# Altium PCB PCB1.PcbDoc
Units mm, origin at the board's own origin, x right, y up, seen from the top; angles counter-clockwise.
Board outline 82.8 x 98 mm, 2 copper layers (Top Layer, Bottom Layer); 9 components, 5 nets, 28 pads, 2 vias.
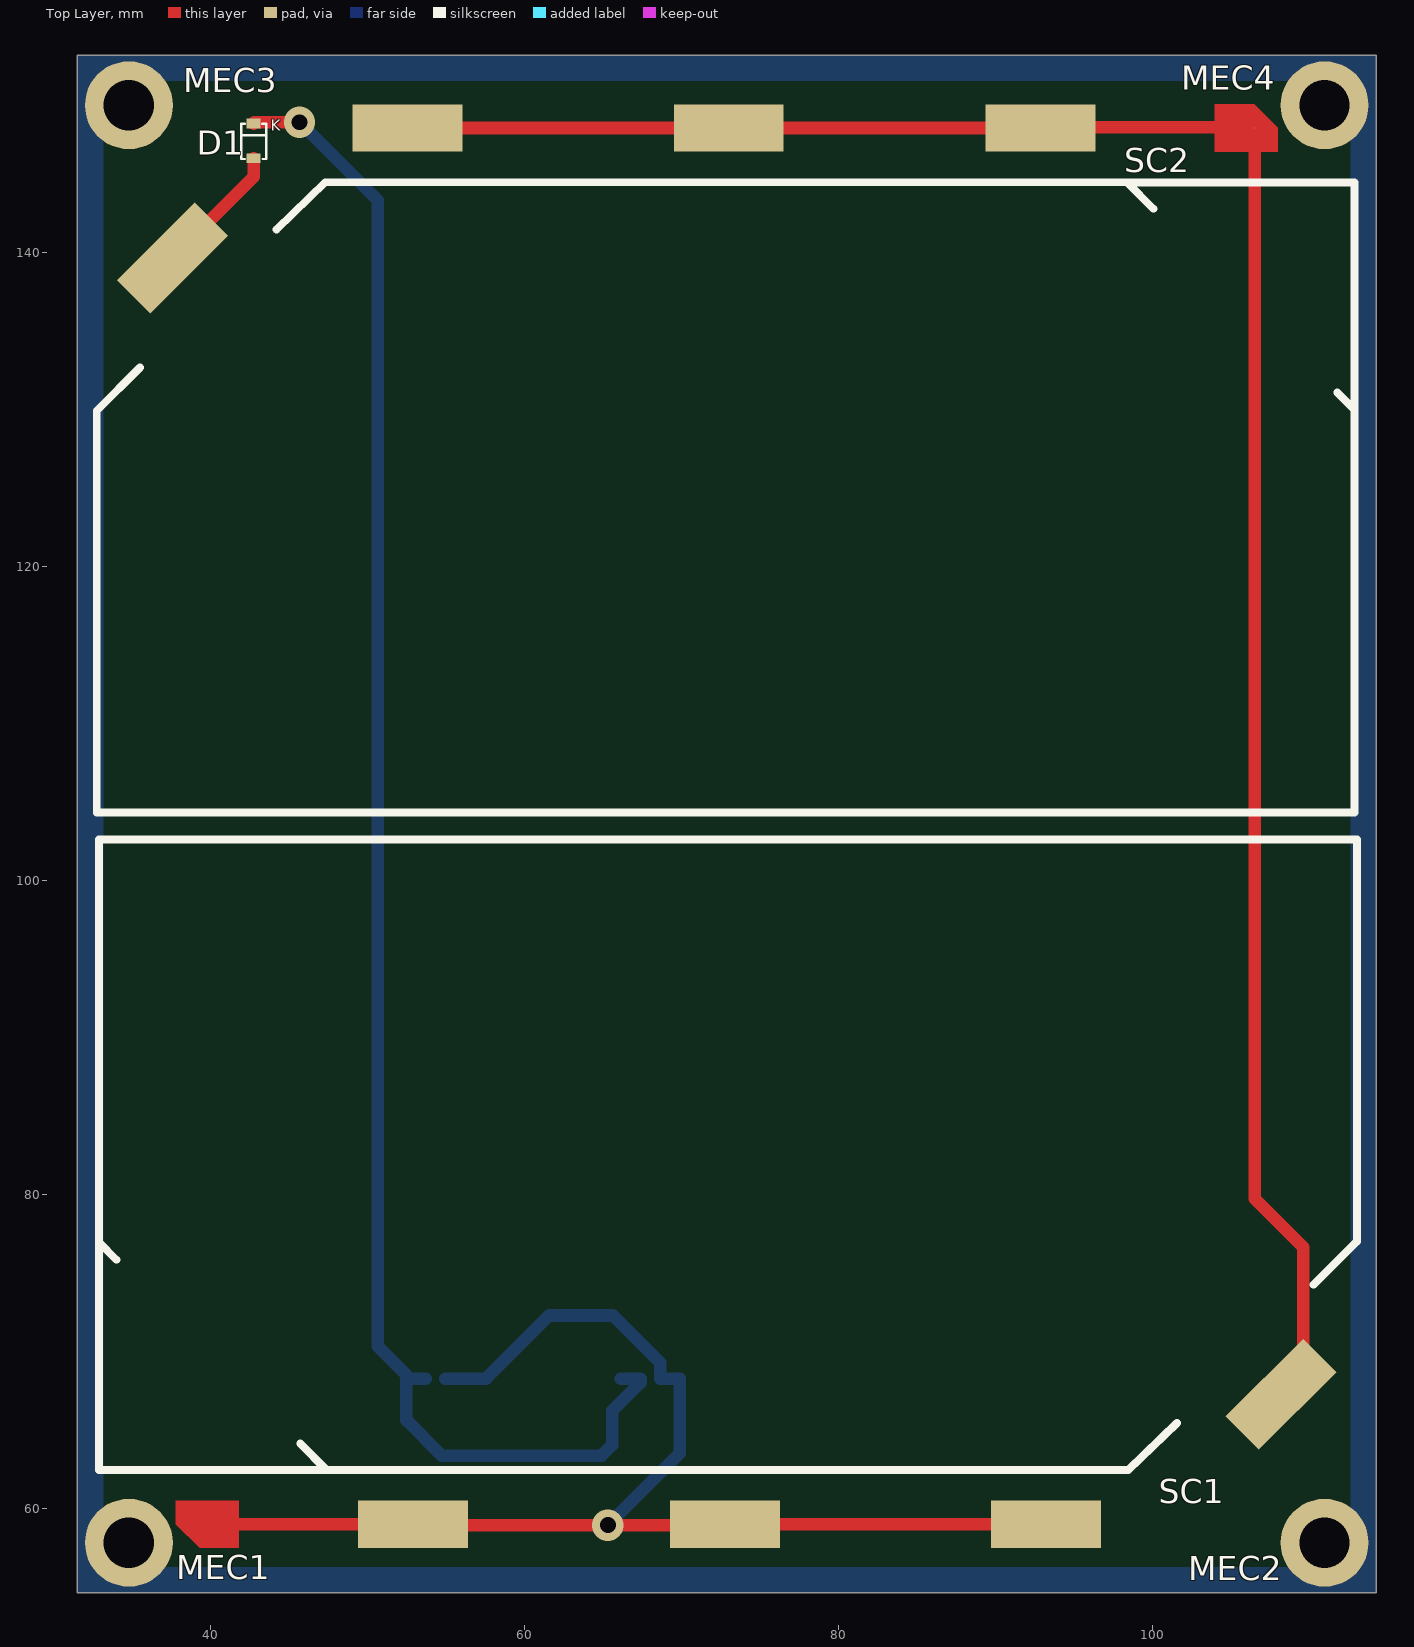
[diagram p0: Top Layer view]
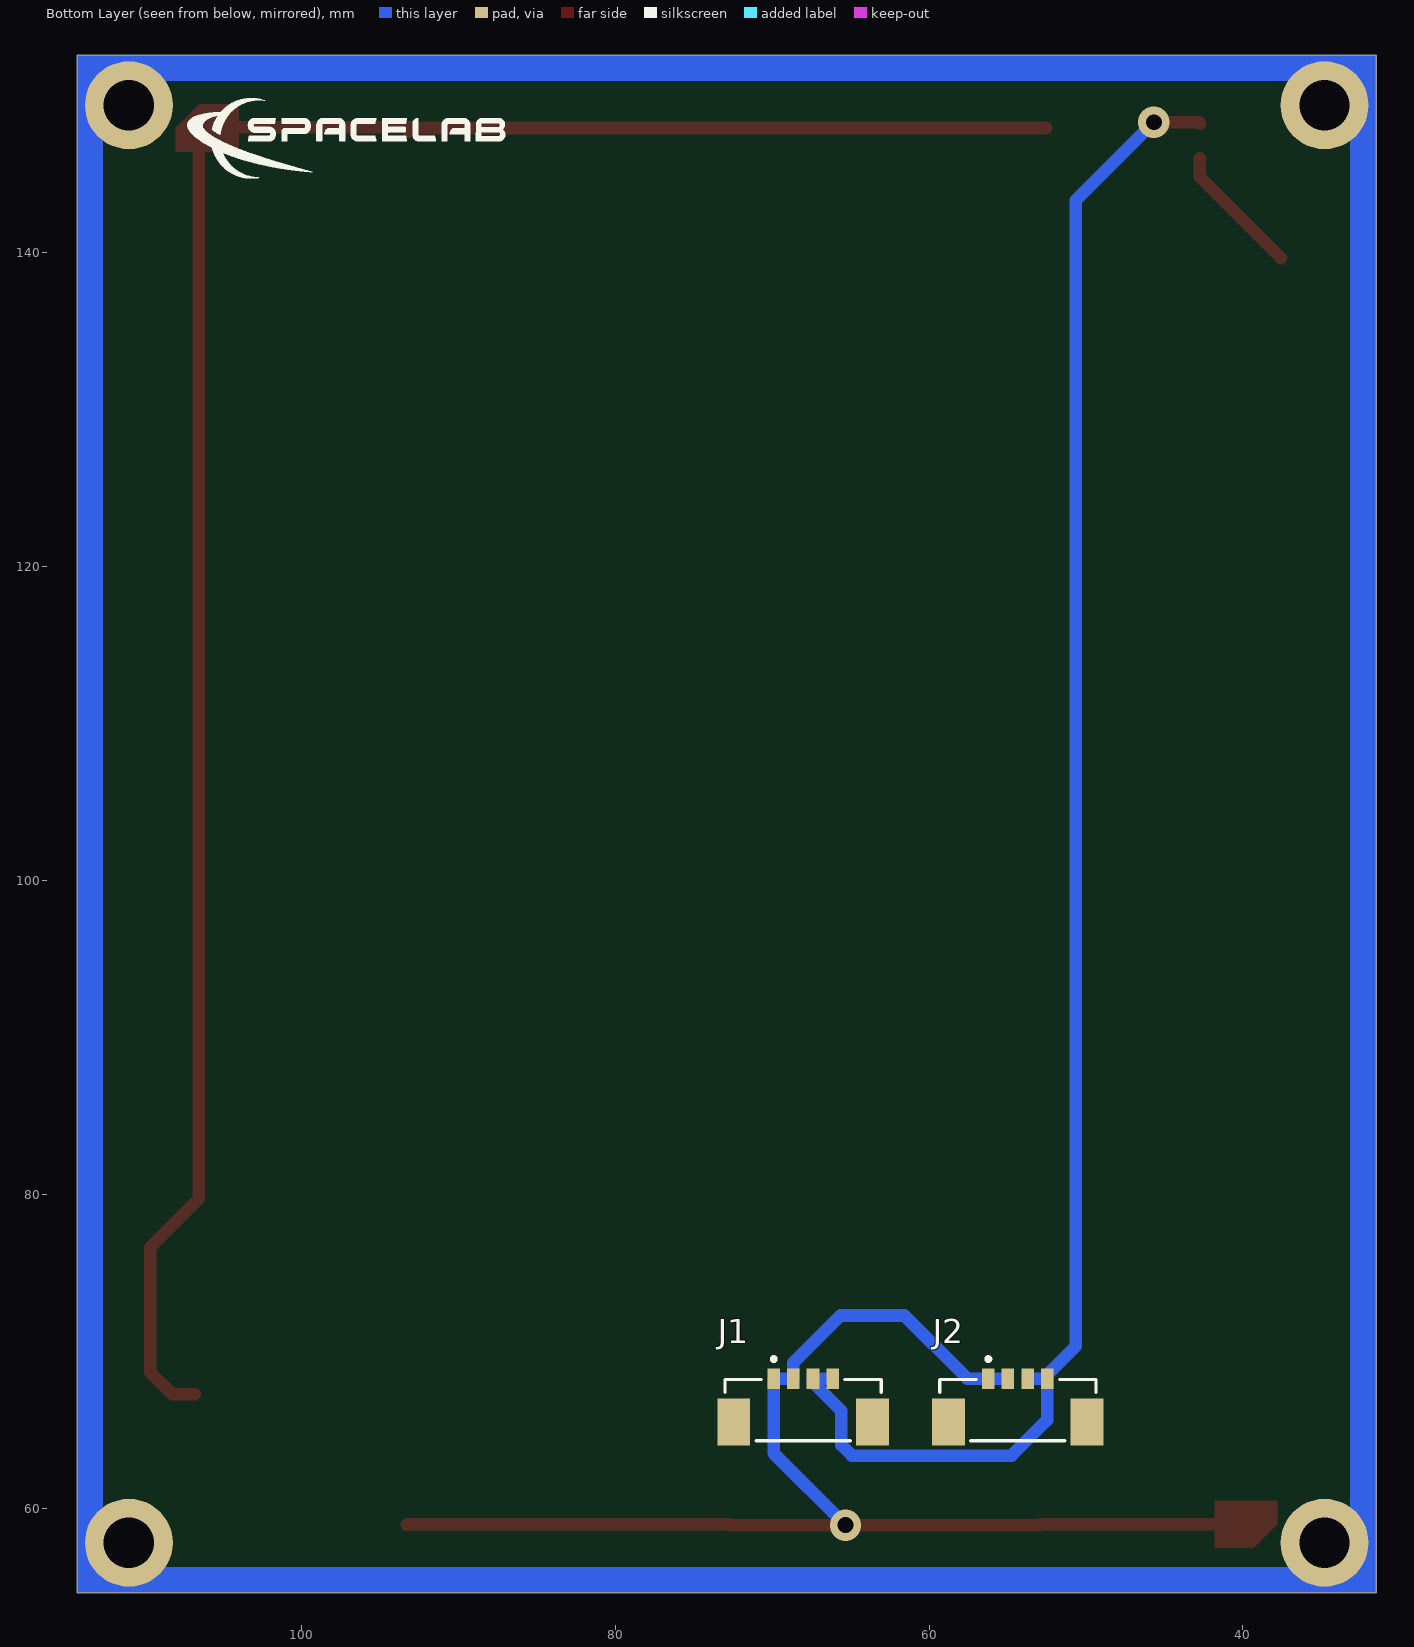
[diagram p1: Bottom Layer view, seen from below]
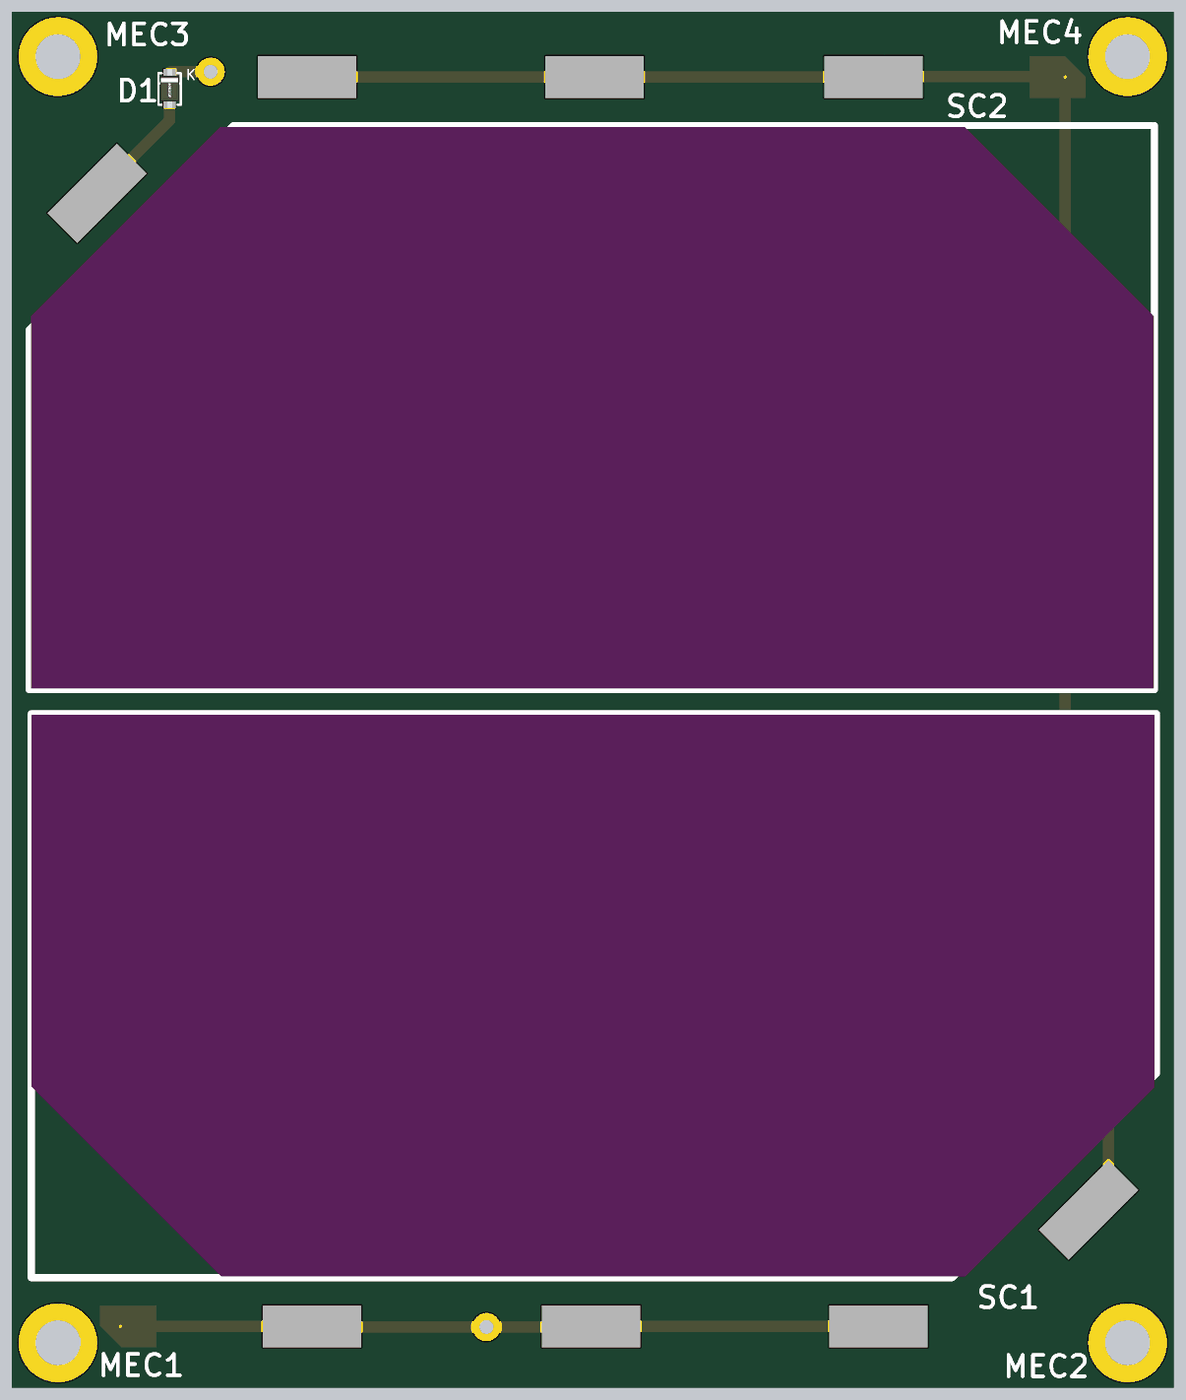
[diagram p2: 3D render of the assembled board from above, using the file's embedded part models]

## Layer stack, top to bottom
Top Solder: solder mask 0.0102, Solder Resist, Dk 3.5
Top Layer: signal copper 0.0356
Dielectric 1: dielectric 0.32, FR-4, Dk 4.8
Bottom Layer: signal copper 0.0356
Bottom Solder: solder mask 0.0102, Solder Resist, Dk 3.5

## Board outline
31.496,54.598 31.496,152.598 114.296,152.598 114.296,54.598

## Design rules (kind name [scope] priority, off if disabled: settings)
Clearance [All] p1: gap=0.254 ignorepadtopadclearanceinfootprint=FALSE except(0: Arc-Hole Track-Hole SMDPad-SMDPad SMDPad-Fill SMDPad-Poly SMDPad-Region SMDPad-Hole THPad-Hole Via-Hole Fill-Hole Poly-Hole Region-Hole Text-Hole)
ComponentClearance [All] p1: gap=0 collisioncheckmode=3 verticalgap=0 showdistances=FALSE donotcheckwithout3dbody=TRUE
PolygonConnect [All] p1: connectstyle=Relief reliefconductorwidth=0.254 reliefentries=4 polygonreliefangle="90 Angle" airgapwidth=0.254
RoutingVias [All] p1: holewidth=1 width=2 viastyle="Through Hole" minholewidth=0.711 minwidth=1.27 maxholewidth=1 maxwidth=2
SolderMaskExpansion [All] p1: expansion=0.102 istentingtop=FALSE
SupplyNets "Schematic Supply Nets_2" [InNet('INPUT_V-')] p1: voltage=0.000
SupplyNets "Schematic Supply Nets_1" [InNet('GND')] p2: voltage=0.000
SupplyNets "Schematic Supply Nets" [InNet('INPUT2_V+')] p3: voltage=0.000
Width [All] p1: maxlimit=0.8 minlimit=0.3 preferedwidth=0.35
29 further rules are at their usual default settings.

## Components (designator, comment, footprint, x,y, rotation, side; value= is the part's Value field where it differs from the comment)
D1 "SMD22WS-TP" SOD323F 42.75,147.075 r270 top
J1 "533980471" FP-533980471-MFG 68.025,66.25 r0 bottom
J2 "533980471" FP-533980471-MFG 54.35,66.25 r0 bottom
MEC1 "M3" HOLE6x6mm 34.796,57.798 r0 top
MEC2 "M3" HOLE6x6mm 110.996,57.798 r0 top
MEC3 "M3" HOLE6x6mm 34.796,149.398 r0 top
MEC4 "M3" HOLE6x6mm 110.996,149.398 r0 top
SC1 "5x8mm" SOLAR_CELL_SEM_FURO_FRONT_BACK 113.05,102.6 r180 top
SC2 "5x8mm" SOLAR_CELL_SEM_FURO_FRONT_BACK 32.75,104.325 r0 top

## Footprints (in the part's own frame and the unit in brackets; to place one, negate y for a bottom-side part, rotate by r counter-clockwise, add the part's x,y. Pads: shape width x height; smd on the part's side, far side on the other; paste and mask are expansions set on the pad)
FP-533980471-MFG [mm]
  rect 0.8x1.3 smd paste+0 mask+0: 1(1.875,-2) 2(0.625,-2) 3(-0.625,-2) 4(-1.875,-2)
  rect 2.1x3 smd paste+0 mask+0: 5(-4.425,0.75) 6(4.425,0.75)
  silkscreen extent -4.97,-3.37 4.97,1.95, body extent -5.07,-2.1 5.07,2.1, height 5.1
HOLE6x6mm [mm]
  round 5.6 hole 3.2: 0(0,0)
SOD323F [mm] "Diode SMD22WS-TP"
  rect 0.63x0.9 smd mask+0.05: 1(-1.15,0)
  rect 0.63x0.89 smd mask+0.05: 2(1.05,0)
  silkscreen extent -1.15,-0.8 1.1,0.8, body extent -1.45,-0.67 1.35,0.68, height 0.75
SOLAR_CELL_SEM_FURO_FRONT_BACK [mm] "Célula sem furos utilizada na frente e costas do cubesat."
  round 0.025 smd: 1(73.8,43.625)
  rect 7x3 smd: 2(60.15,43.625) 3(40.275,43.625) 4(19.8,43.625)
  rect 7x3 smd rot 45: 5(4.83,35.34)
  Top Layer region: 75.25,42.125 71.25,42.125 71.25,45.125 73.75,45.125 75.25,43.625
  silkscreen extent 0,0 80.16,40.16, body extent 0.12,0.08 80.13,40.08, height 0.22

## Part data
D1: library part DIODE_SCHOTTKY_20V_2A_SMD22WS-TP, "Diode Schottky 20 V 2A Surface Mount SOD-323", PartNumber=SMD22WS-TP
J1 J2: library part CMP-04776-000105-1, "CONN HEADER SMD 4POS 1.25MM", Ambient Temperature Range High=+105°C, Ambient Temperature Range Low=-40°C, Current Rating=1A, Manufacturer=Molex, Package=0, Temperature="-40°C to +105°C", Voltage Rating=125V, Automotive=No, Category=Conn, ComponentLink2Description=Datasheet, ComponentLink2URL=https://www.molex.com/pdm_docs/ps/PS-51021-024-001.pdf, Conn Gender=Male, Conn Orientation=Vertical, Contact Material=Tin, Device Class L1=Connectors, Device Class L2="Headers and Wire Housings", Device Class L3=unset, Digikey Description="CONN HEADER SMD 4POS 1.25MM", Footprint Url=https://www.molex.com/pdm_docs/sd/533980471_sd.pdf, Height=5.1mm, Lead Free=Yes, Manufacturer Part Number=533980471, Number Of Contacts=4, Number Of Rows=1, Octopart=https://octopart.com/53398-0471-molex-655296, Pitch=1.25mm, RoHS=TRUE, Standoff Height=0.05mm, Temperature Range High=+105°C, Temperature Range Low=-40°C
MEC1 MEC2 MEC3 MEC4: library part "M3 hole", "M3 hole"
SC1 SC2: library part "SOLAR CELL", Manufacturer="Yim Space", PDM Number=SC-3GA-3

## Via types
v1: diameter 2, hole 1, Top Layer to Bottom Layer, 2 vias

## Nets (pads, with @x,y where several pads share a name; then routed paths per layer and width w, separated by ;. In a path a pad name is that pad's centre, name@x,y a point inside that pad or via, vN(x,y) a via of type N, cw(c..) or ccw(c..) an arc to the next point about the centre after c; other vN are vias at no path point)
GND: MEC1.0 MEC2.0 MEC3.0 MEC4.0
INPUT2_V+: D1.1 J1.3 J1.4 J2.3 J2.4 | length 110.3
  Top Layer w0.8: D1.1 42.75,148.26 42.8,148.31 42.835,148.31 42.85,148.325 v1(45.675,148.325)
  Bottom Layer w0.8: v1(45.675,148.325) 50.65,143.35 50.65,70.325 52.475,68.5 J2.4 ; J2.3 J2.4 ; J1.4 J1.3 67.4,68 65.596,66.196 65.596,64.021 64.921,63.346 54.735,63.346 52.475,65.606 J2.4
INPUT_V-: J1.1 J1.2 J2.1 J2.2 SC1.1 SC1.2 SC1.3 SC1.4 | length 84.2
  Top Layer w0.8: SC1.1 SC1.2 52.95,58.925 v1(65.325,58.925) 72.725,58.925 SC1.3 SC1.4 SC1.4@93.275,58.95
  Bottom Layer w0.8: J2.2 J2.1 57.556,68.25 61.585,72.279 65.64,72.279 68.65,69.269 J1.2 J1.1 69.9,63.5 v1(65.325,58.925)
NetD1_2: D1.2 SC2.5 | length 8.5
  Top Layer w0.8: SC2.5 42.75,144.835 D1.2
NetSC1_5: SC1.5 SC2.1 SC2.2 SC2.3 SC2.4 | length 138.2
  Top Layer w0.8: SC2.4 SC2.3 SC2.2 SC2.2@93.144,147.706 ; SC2.2@92.941,147.991 106.509,147.991 ; SC2.1 106.55,79.706 109.634,76.621 109.634,68.675 SC1.5 SC1.5@106.802,67.26
pads on no net: J1.5 J1.6 J2.5 J2.6

## Other copper
Bottom Layer:
  rectangle net GND: 31.496,54.598 114.296,56.25
  region net GND: 33.175,54.598 33.175,152.598 31.496,152.598 31.496,54.598
  rectangle net GND: 31.496,150.948 114.296,152.598
  region net GND: 114.296,54.598 114.296,152.598 112.646,152.598 112.646,54.598

## Silkscreen, mask and mechanical layers (free items; w line width, h text height)
Bottom Overlay:
  drawing of 9 lines, arcs and shapes, not listed
Mechanical 16:
  drawing of 38 lines, arcs and shapes, not listed
  text "1" at 36.246,189.599 h1.78
  text "2" at 108.89,189.599 h1.78
  text "3" at 182.042,189.599 h1.78
  text "4" at 254.94,189.599 h1.78
  text "Fabrication specifications:" at 161.136,178.359 h3.1
  text "A" at 1.905,166.587 h1.78
  text "A" at 288.925,166.587 h1.78
  text "- Copper base 1OZ:  / - PCB Material: Prepeg FR4-Standard / - PCB Tickness: 1.6mm / - PCB Surface: HASL (with lead)" at 161.13,161.375 h1.73
  text "- Silkscreen Color: White (top and bottom) / - Soldermask Color: Green / - Vias: Force Complete Tenting / - Special: Stack-up (herein included)" at 218.83,161.375 h1.73
  text "Assembly specifications:" at 161.411,155.379 h3.1
  text "- Solder composition: Include lead / - Fiducials: 3 top and 3 bottom avaliable / - Check BOM for not placed components" at 161.405,138.385 h1.73
  text "B" at 1.905,118.53 h1.78
  text "B" at 288.925,118.53 h1.78
  text "C" at 1.905,70.016 h1.78
  text "C" at 288.925,70.016 h1.78
  text "SpaceLab - Federal University of Santa Catarina" at 198,25.988 h2.5
  text "D" at 1.905,22.01 h1.78
  text "D" at 288.925,22.01 h1.78
  text "Project:" at 198,21.488 h2.5
  text "EPS2" at 206,21.488 h2.5
  text "Layer:" at 198,16.488 h2.5
  text "Designed by:" at 198,11.488 h2.5
  text "Project Code:" at 256,11.488 h2.5
  text "EPS2" at 270.5,11.488 h2.5
  text "=DesigndBy" at 211.926,11.455 h2.5
  text "=Revision" at 236.026,6.555 h2.5
  text "Date:" at 198,6.488 h2.5
  text "'.Print_Date'" at 204,6.488 h2.5
  text "Version:" at 227,6.488 h2.5
  text "Size:" at 256,6.488 h2.5
  text "A4" at 262,6.488 h2.5
  text "1" at 36.246,1.639 h1.78
  text "2" at 108.89,1.639 h1.78
  text "3" at 182.042,1.639 h1.78
  text "4" at 254.94,1.639 h1.78

## Text inside footprints (layer, text, board x,y; h text height)
D1: Top Overlay "K" at 43.85,147.775 h0.7